# Altium PCB PCB1.PcbDoc
Units mil, origin at the board's own origin, x right, y up, seen from the top; angles counter-clockwise.
Board outline 6000 x 4000 mil, 2 copper layers (Top Layer, Bottom Layer); 22 components, 34 nets, 93 pads, 16 vias.
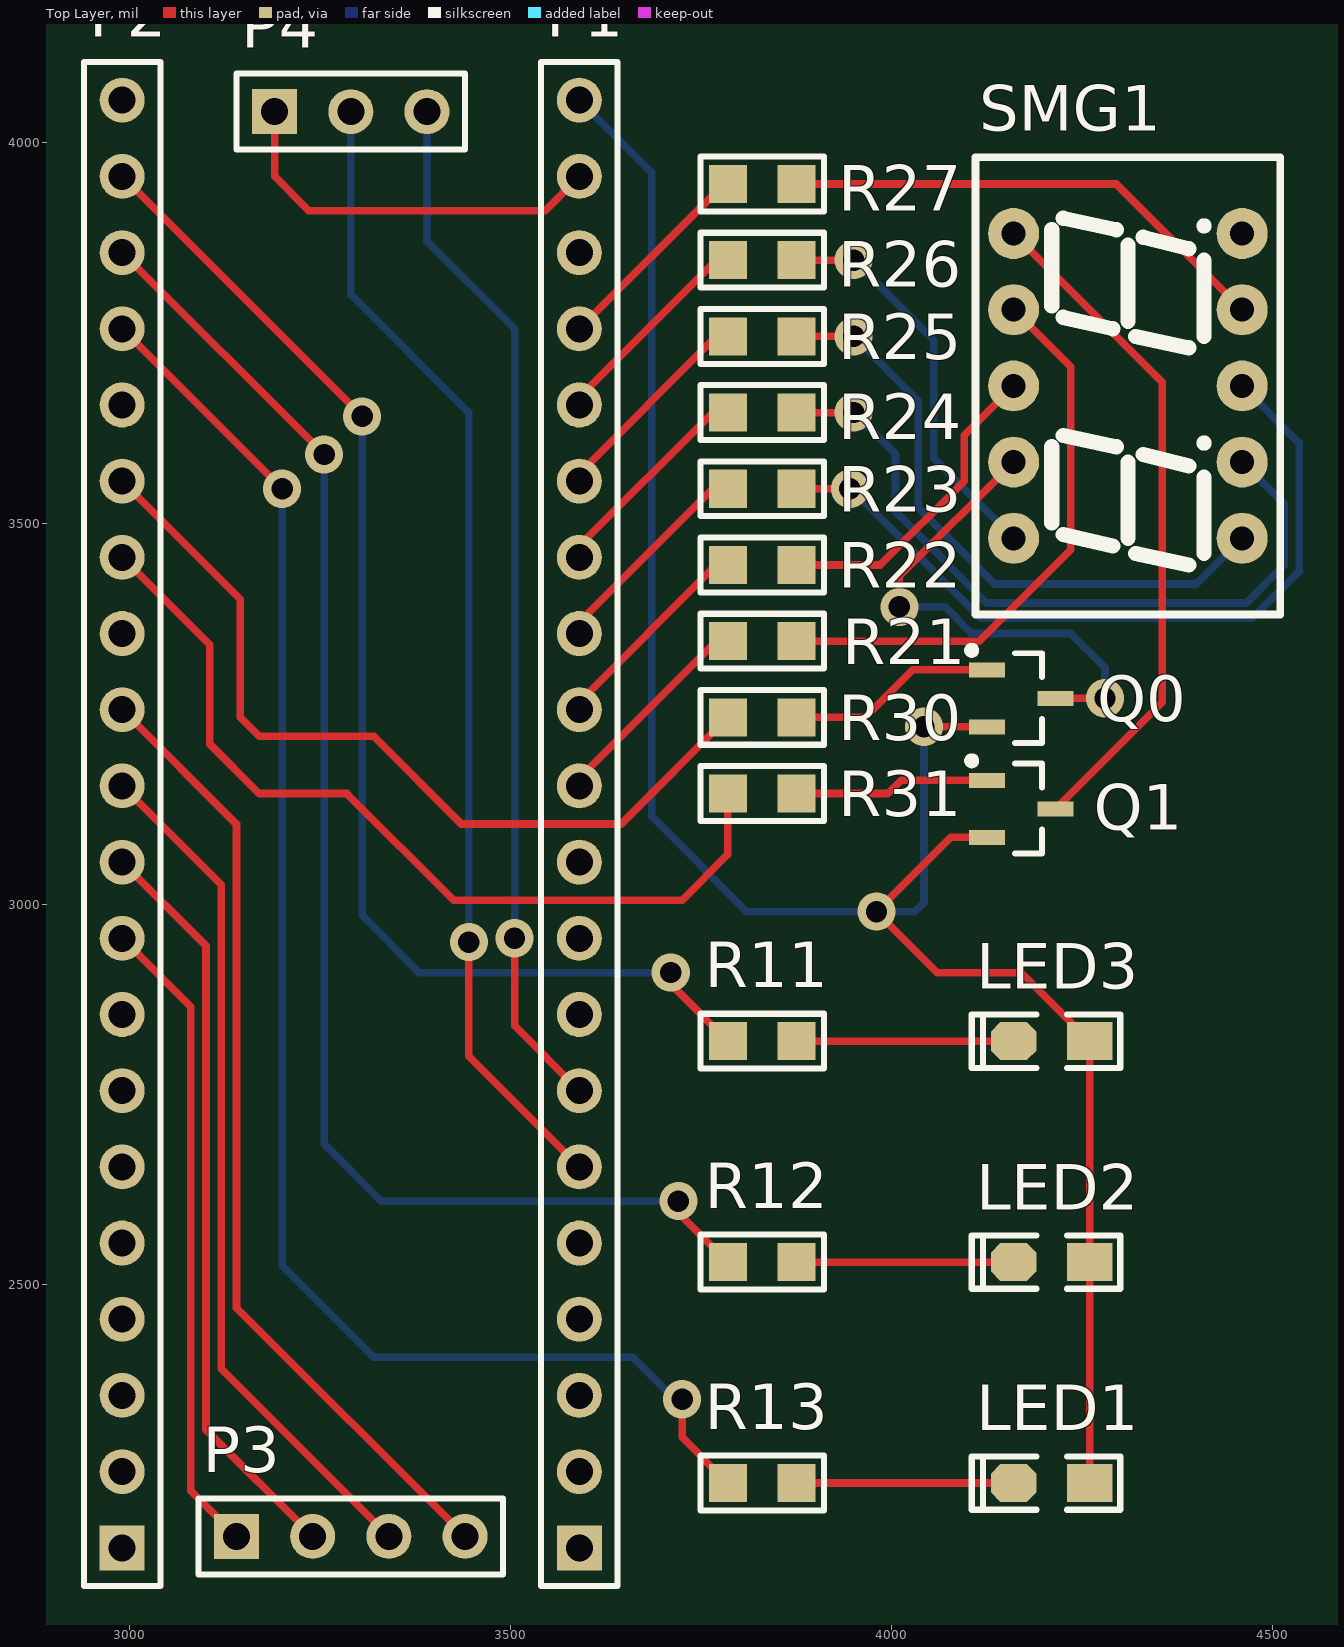
[diagram p0: Top Layer view]
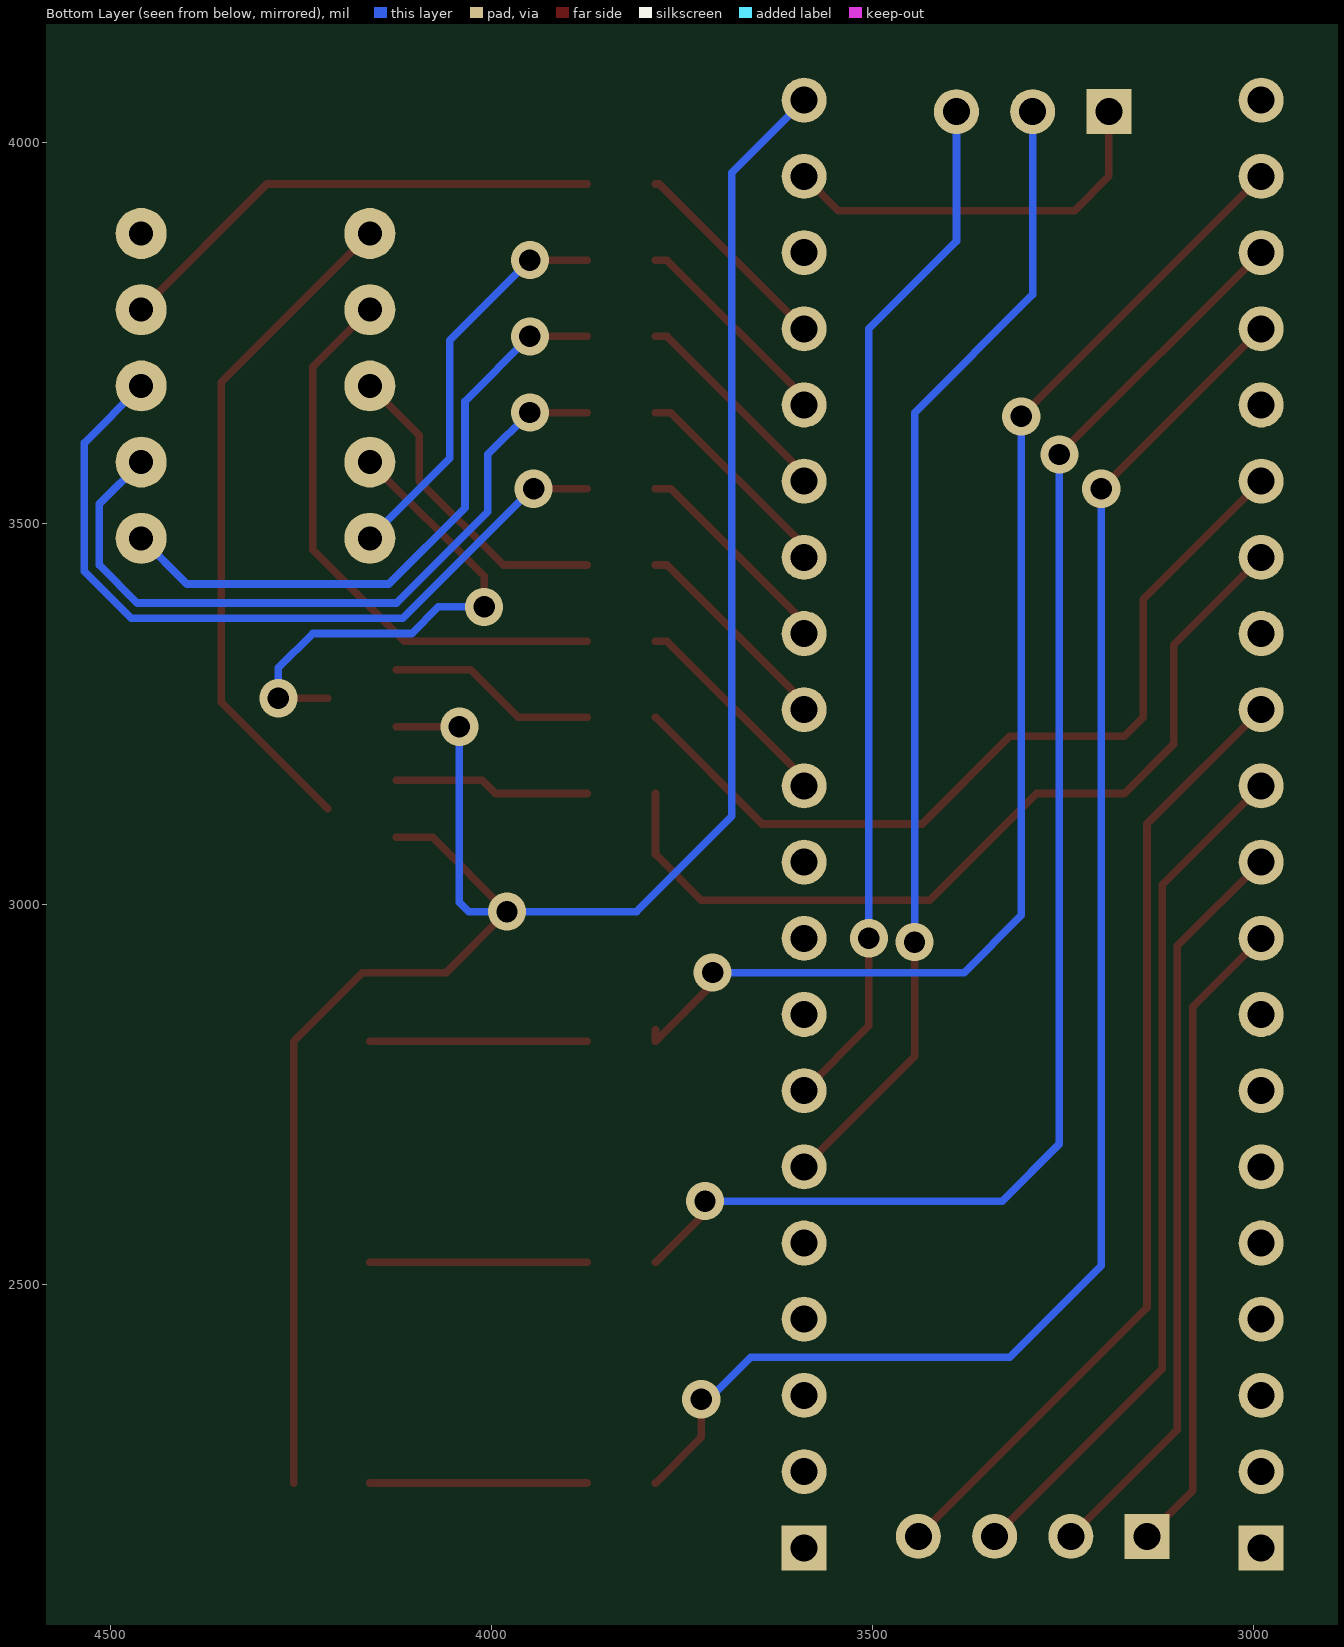
[diagram p1: Bottom Layer view, seen from below]
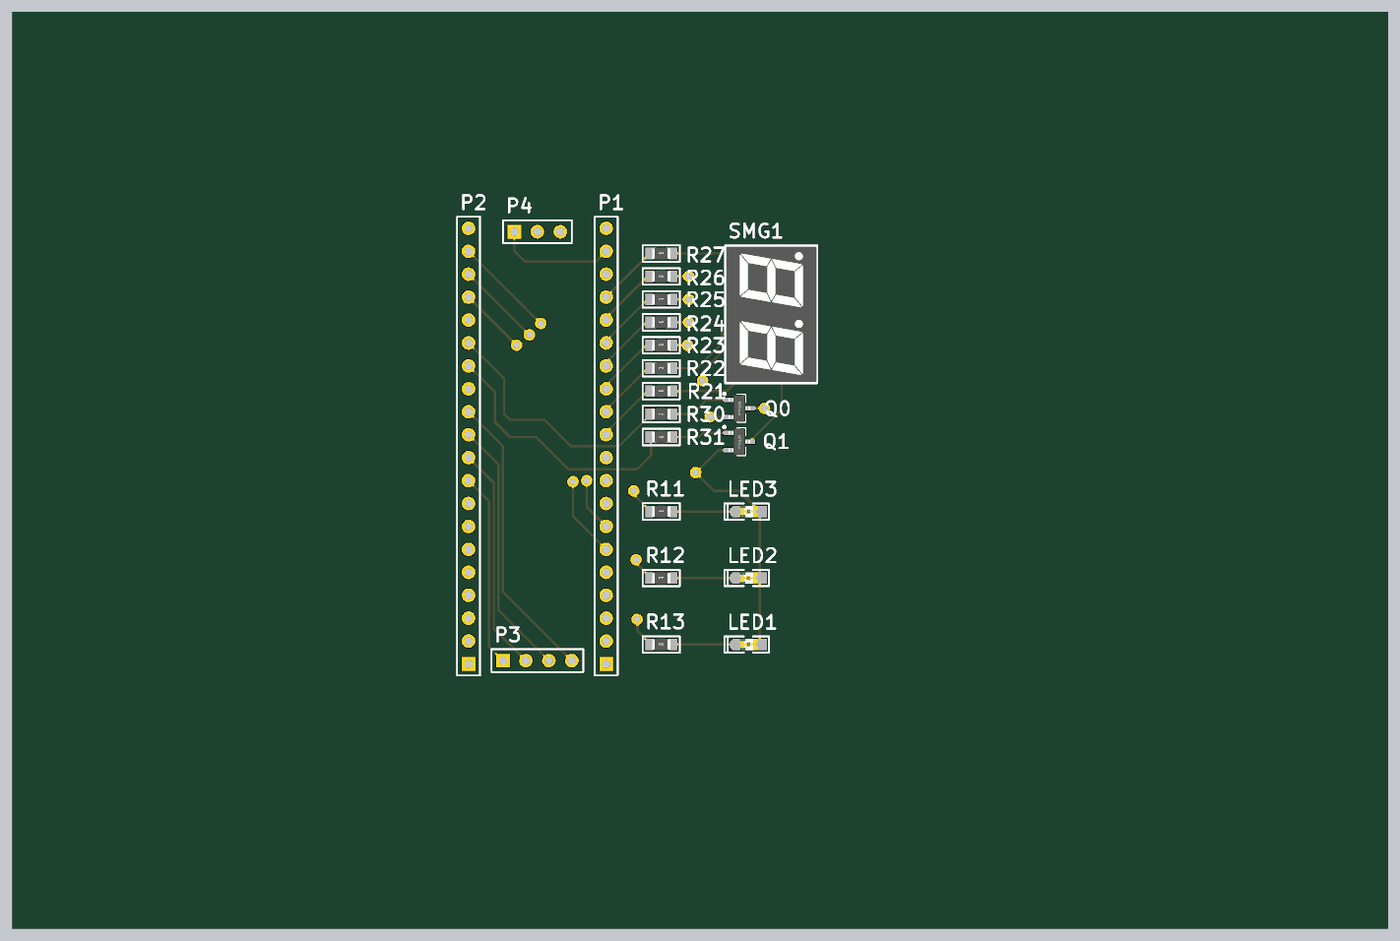
[diagram p2: 3D render of the assembled board from above, using the file's embedded part models]

## Layer stack, top to bottom
Top Solder: solder mask 0.4, Solder Resist, Dk 3.5
Top Layer: signal copper 1.4
Dielectric 1: dielectric 12.6, FR-4, Dk 4.8
Bottom Layer: signal copper 1.4
Bottom Solder: solder mask 0.4, Solder Resist, Dk 3.5

## Board outline
1000,1000 7000,1000 7000,5000 1000,5000

## Design rules (kind name [scope] priority, off if disabled: settings)
Clearance [All] p1: gap=10 ignorepadtopadclearanceinfootprint=FALSE except(0: Arc-Hole Track-Hole SMDPad-Hole THPad-Hole Via-Hole Fill-Hole Poly-Hole Region-Hole Text-Hole)
PolygonConnect [All] p1: connectstyle=Relief reliefconductorwidth=10 reliefentries=4 polygonreliefangle="90 Angle" airgapwidth=10
RoutingVias [All] p1: holewidth=28 width=50 viastyle="Through Hole" minholewidth=28 minwidth=50 maxholewidth=28 maxwidth=50
SolderMaskExpansion [All] p1: expansion=4
Width [All] p1: maxlimit=10 minlimit=10 preferedwidth=10
30 further rules are at their usual default settings.

## Components (designator, comment, footprint, x,y, rotation, side; value= is the part's Value field where it differs from the comment)
LED1 "红色" "LED 0805G" 4210,2240 r180 top
LED2 "黄色" "LED 0805G" 4210,2530 r180 top
LED3 "绿色" "LED 0805G" 4210,2820 r180 top
P1 "Header 20" HDR1X20 3590,2155 r90 top
P2 "Header 20" HDR1X20 2990,2155 r90 top
P3 "spi" HDR1X4 3140,2170 r0 top
P4 "usart" HDR1X3 3190,4040 r0 top
Q0 "SS8550" SOT23-3N 4170,3270 r270 top
Q1 "SS8550" SOT23-3N 4170,3125 r270 top
R11 "4.7K" "R 0805" 3830,2820 r0 top
R12 "4.7K" "R 0805" 3830,2530 r0 top
R13 "4.7K" "R 0805" 3830,2240 r0 top
R21 "1K" "R 0805" 3830,3345 r0 top
R22 "1K" "R 0805" 3830,3445 r0 top
R23 "1K" "R 0805" 3830,3545 r0 top
R24 "1K" "R 0805" 3830,3645 r0 top
R25 "1K" "R 0805" 3830,3745 r0 top
R26 "1K" "R 0805" 3830,3845 r0 top
R27 "1K" "R 0805" 3830,3945 r0 top
R30 "4.7K" "R 0805" 3830,3245 r180 top
R31 "4.7K" "R 0805" 3830,3145 r180 top
SMG1 "2821B" "SMG 0.28-2P" 4310,3680 r90 top

## Footprints (in the part's own frame and the unit in brackets; to place one, negate y for a bottom-side part, rotate by r counter-clockwise, add the part's x,y. Pads: shape width x height; smd on the part's side, far side on the other; paste and mask are expansions set on the pad)
HDR1X3 [mm] "Connector; Header; 3 Position"
  rect 1.5x1.5 hole 0.9: 1(0,0)
  round 1.5 hole 0.9: 2(2.54,0) 3(5.08,0)
  silkscreen extent -1.27,-1.27 6.35,1.27
HDR1X4 [mm] "Connector; Header; 4 Position"
  rect 1.5x1.5 hole 0.9: 1(0,0)
  round 1.5 hole 0.9: 2(2.54,0) 3(5.08,0) 4(7.62,0)
  silkscreen extent -1.27,-1.27 8.89,1.27
HDR1X20 [mm] "Connector; Header; 20 Position"
  rect 1.5x1.5 hole 0.9: 1(0,0)
  round 1.5 hole 0.9: 2(2.54,0) 3(5.08,0) 4(7.62,0) 5(10.16,0) 6(12.7,0) 7(15.24,0) 8(17.78,0) 9(20.32,0) 10(22.86,0) 11(25.4,0) 12(27.94,0) 13(30.48,0) 14(33.02,0) 15(35.56,0) 16(38.1,0) 17(40.64,0) 18(43.18,0) 19(45.72,0) 20(48.26,0)
  silkscreen extent -1.27,-1.27 49.53,1.27
"LED 0805G" [mil] "绿色0805LED"
  rect 60x50 smd: 1(-50,0)
  oct 60x50 smd: 2(50,0)
  silkscreen extent -90,-35 105,35, body extent -39,-25 39,25, height 32
"R 0805" [mil] "1/8W贴片电阻"
  rect 50x50 smd: 1(-45,0) 2(45,0)
  silkscreen extent -81,-36 81,36, body extent -39,-25 39,25, height 20
"SMG 0.28-2P" [mm] "15*10*6mm(长宽厚)"
  round 1.7 hole 0.8: 1(-5.08,-3.81) 2(-2.54,-3.81) 3(0,-3.81) 4(2.54,-3.81) 5(5.08,-3.81) 6(5.08,3.81) 7(2.54,3.81) 8(0,3.81) 9(-2.54,3.81) 10(-5.08,3.81)
  silkscreen extent -7.62,-5.08 7.62,5.08, body extent -7.5,-5 7.5,5, height 6
SOT23-3N [mm] "3x1.3x1mm(长宽高)"
  rect 0.5x1.2 smd: 1(-0.95,-1.143) 2(0.95,-1.143) 3(0,1.143)
  silkscreen extent -1.72,-1.78 1.5,0.7, body extent -1.5,-1.2 1.5,1.2, height 1.05

## Part data
LED1 LED2 LED3: library part LED-SMD, "贴片LED", BOM名称=贴片LED, 学习资源=www.ooocke.com, 版权归属=源创客
P1 P2: "Header, 20-Pin", LatestRevisionDate=17-Jul-2002, LatestRevisionNote="Re-released for DXP Platform.", Publisher="Altium Limited"
P3: library part "Header 4", "Header, 4-Pin", LatestRevisionDate=17-Jul-2002, LatestRevisionNote="Re-released for DXP Platform.", Publisher="Altium Limited"
P4: library part "Header 3", "Header, 3-Pin", LatestRevisionDate=17-Jul-2002, LatestRevisionNote="Re-released for DXP Platform.", Publisher="Altium Limited"
Q0 Q1: library part 8550-SMD, "高频放大-PNP型", BOM名称=高频放大-PNP型, 学习资源=www.ooocke.com, 属性="40V 1.5A 1W 100MHZ", 版权归属=源创客
R11 R12 R13 R21 R22 R23 R24 R25 R26 R27 R30 R31: library part R, "贴片电阻", BOM名称=贴片电阻, 学习资源=www.ooocke.com, 版权归属=源创客
SMG1: "0.28寸2位共阳数码管", BOM名称=0.28寸2位共阳, 学习资源=www.ooocke.com, 版权归属=源创客

## Via types
v1: diameter 50, hole 28, Top Layer to Bottom Layer, 16 vias

## Nets (pads, with @x,y where several pads share a name; then routed paths per layer and width w, separated by ;. In a path a pad name is that pad's centre, name@x,y a point inside that pad or via, vN(x,y) a via of type N, cw(c..) or ccw(c..) an arc to the next point about the centre after c; other vN are vias at no path point)
3.3V: LED1.1 LED2.1 LED3.1 P1.20 Q0.2 Q1.2 | length 2822.3
  Top Layer w10: v1(4042.4,3232.6) Q0.2 ; Q1.2 4077.6,3087.6 v1(3980,2990) 4060,2910 4170,2910 LED3.1 LED2.1 LED1.1
  Bottom Layer w10: P1.20 3685,3960 3685,3115 3810,2990 v1(3980,2990) 4030,2990 4042.4,3002.4 v1(4042.4,3232.6)
A: R21.2 SMG1.7 | length 755.8
  Top Layer w10: R21.2 4115,3345 4235,3465 4235,3705 SMG1.7
B: R22.2 SMG1.8 | length 417.5
  Top Layer w10: R22.2 3985,3445 4095,3555 4095,3615 SMG1.8
BIT0: P2.15 R30.2 | length 1130.2
  Top Layer w10: P2.15 3145,3400 3145,3245 3170,3220 3320,3220 3435,3105 3645,3105 R30.2
BIT1: P2.14 R31.2 | length 1162.4
  Top Layer w10: P2.14 3105,3340 3105,3210 3170,3145 3285,3145 3425,3005 3725,3005 3785,3065 R31.2
C: R23.2 SMG1.3 | length 1030.3
  Top Layer w10: R23.2 v1(3945,3545)
  Bottom Layer w10: v1(3945,3545) 3946.72,3545 4116.72,3375 4473.28,3375 4535,3436.72 4535,3605 SMG1.3
D: R24.2 SMG1.2 | length 966
  Top Layer w10: R24.2 v1(3950,3645)
  Bottom Layer w10: v1(3950,3645) 4005,3590 4005,3515 4125,3395 4465,3395 4515,3445 4515,3525 SMG1.2
E: R25.2 SMG1.1 | length 826.5
  Top Layer w10: R25.2 v1(3950,3745)
  Bottom Layer w10: v1(3950,3745) 4035,3660 4035,3520 4135,3420 4400,3420 SMG1.1
F: R26.2 SMG1.10 | length 527
  Top Layer w10: R26.2 v1(3950,3845)
  Bottom Layer w10: v1(3950,3845) 4055,3740 4055,3585 SMG1.10
G: R27.2 SMG1.4 | length 653.3
  Top Layer w10: R27.2 4295,3945 SMG1.4
GND: P1.19 P4.1 | length 522.3
  Top Layer w10: P4.1 3190,3955 3235,3910 3545,3910 P1.19
GREEN: P2.19 R11.1 | length 1672.6
  Top Layer w10: P2.19 v1(3305,3640) ; v1(3710,2910) 3710,2895 R11.1 R11.1@3785,2835
  Bottom Layer w10: v1(3305,3640) 3305,2985 3380,2910 v1(3710,2910)
MISO: P2.10 P3.2 | length 988.6
  Top Layer w10: P2.10 3100,2945 3100,2310 P3.2
MOSI: P2.9 P3.1 | length 847.1
  Top Layer w10: P2.9 3080,2865 3080,2230 P3.1
NetLED1_2: LED1.2 R13.2 | length 285
  Top Layer w10: R13.2 LED1.2
NetLED2_2: LED2.2 R12.2 | length 285
  Top Layer w10: R12.2 LED2.2
NetLED3_2: LED3.2 R11.2 | length 285
  Top Layer w10: R11.2 LED3.2
NetQ0_1: Q0.1 R30.1 | length 275.8
  Top Layer w10: R30.1 3965,3245 4027.4,3307.4 Q0.1
NetQ0_3: Q0.3 SMG1.9 | length 660.3
  Top Layer w10: v1(4010,3390) 4010,3430 SMG1.9 ; Q0.3 v1(4280,3270)
  Bottom Layer w10: v1(4010,3390) 4070,3390 4105,3355 4235,3355 4280,3310 v1(4280,3270)
NetQ1_1: Q1.1 R31.1 | length 257.2
  Top Layer w10: R31.1 3995,3145 4012.4,3162.4 Q1.1
NetQ1_3: Q1.3 SMG1.6 | length 893.8
  Top Layer w10: SMG1.6 4355,3685 4355,3265 Q1.3
NSS: P2.12 P3.4 | length 1271.4
  Top Layer w10: P2.12 3140,3105 3140,2470 P3.4
RED: P2.17 R13.1 | length 2049.3
  Top Layer w10: P2.17 v1(3200,3545) ; v1(3725,2350) 3725,2300 R13.1
  Bottom Layer w10: v1(3200,3545) 3200,2525 3320,2405 3660,2405 3715,2350 v1(3725,2350)
RX: P1.7 P4.3 | length 1367.8
  Top Layer w10: v1(3505,2955) 3505,2840 P1.7
  Bottom Layer w10: P4.3 3390,3870 3505,3755 v1(3505,2955)
SCK: P2.11 P3.3 | length 1130
  Top Layer w10: P2.11 3120,3025 3120,2390 P3.3
SEG-A: P1.11 R21.1 | length 279.6
  Top Layer w10: P1.11 3590,3165 3770,3345 R21.1
SEG-B: P1.12 R22.1 | length 279.6
  Top Layer w10: P1.12 3590,3265 3770,3445 R22.1
SEG-C: P1.13 R23.1 | length 282.5
  Top Layer w10: P1.13 3590,3370 3765,3545 R23.1
SEG-D: P1.14 R24.1 | length 282.5
  Top Layer w10: P1.14 3590,3470 3765,3645 R24.1
SEG-E: P1.15 R25.1 | length 279.6
  Top Layer w10: P1.15 3590,3565 3770,3745 R25.1
SEG-F: P1.16 R26.1 | length 279.6
  Top Layer w10: P1.16 3590,3665 3770,3845 R26.1
SEG-G: P1.17 R27.1 | length 273.7
  Top Layer w10: P1.17 3780,3945 R27.1
TX: P1.6 P4.2 | length 1509.3
  Top Layer w10: v1(3445,2950) 3445,2800 P1.6
  Bottom Layer w10: P4.2 3290,3800 3445,3645 v1(3445,2950)
YELLOW: P2.18 R12.1 | length 1882.8
  Top Layer w10: P2.18 v1(3255,3590) ; v1(3720,2610) 3720,2595 R12.1
  Bottom Layer w10: v1(3255,3590) 3255,2685 3330,2610 v1(3720,2610)
pads on no net: P1.1 P1.2 P1.3 P1.4 P1.5 P1.8 P1.9 P1.10 P1.18 P2.1 P2.2 P2.3 P2.4 P2.5 P2.6 P2.7 P2.8 P2.13 P2.16 P2.20 SMG1.5